# Altium PCB PCB1.PcbDoc
Units mil, origin at the board's own origin, x right, y up, seen from the top; angles counter-clockwise.
Board outline 1692.91 x 1692.91 mil, 2 copper layers (Top Layer, Bottom Layer); 22 components, 14 nets, 60 pads, 13 vias.
Unrouted connection lines stored in the file: 4.
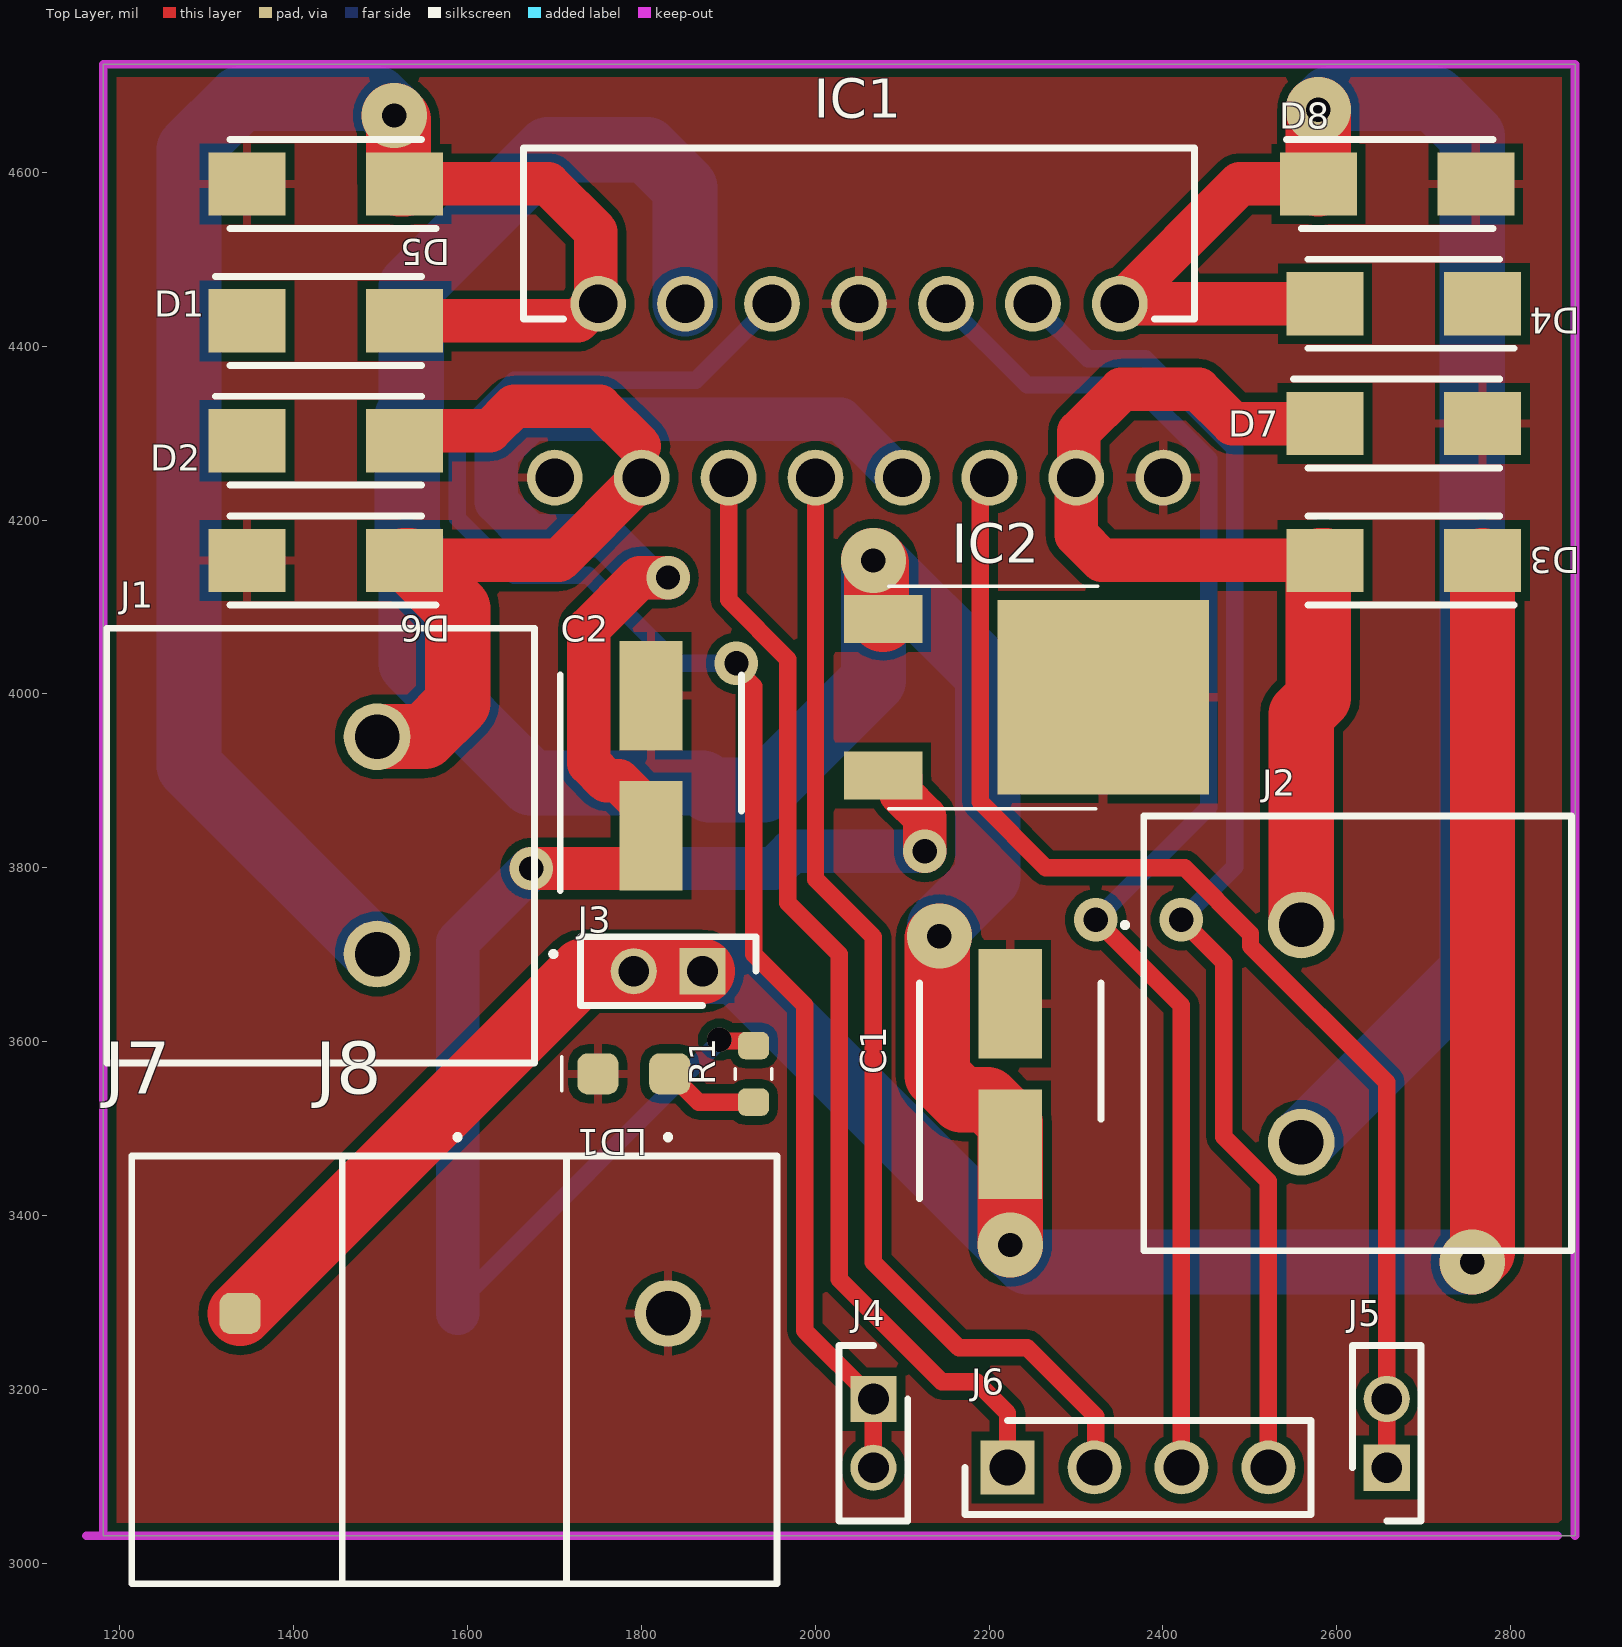
[diagram p0: Top Layer view]
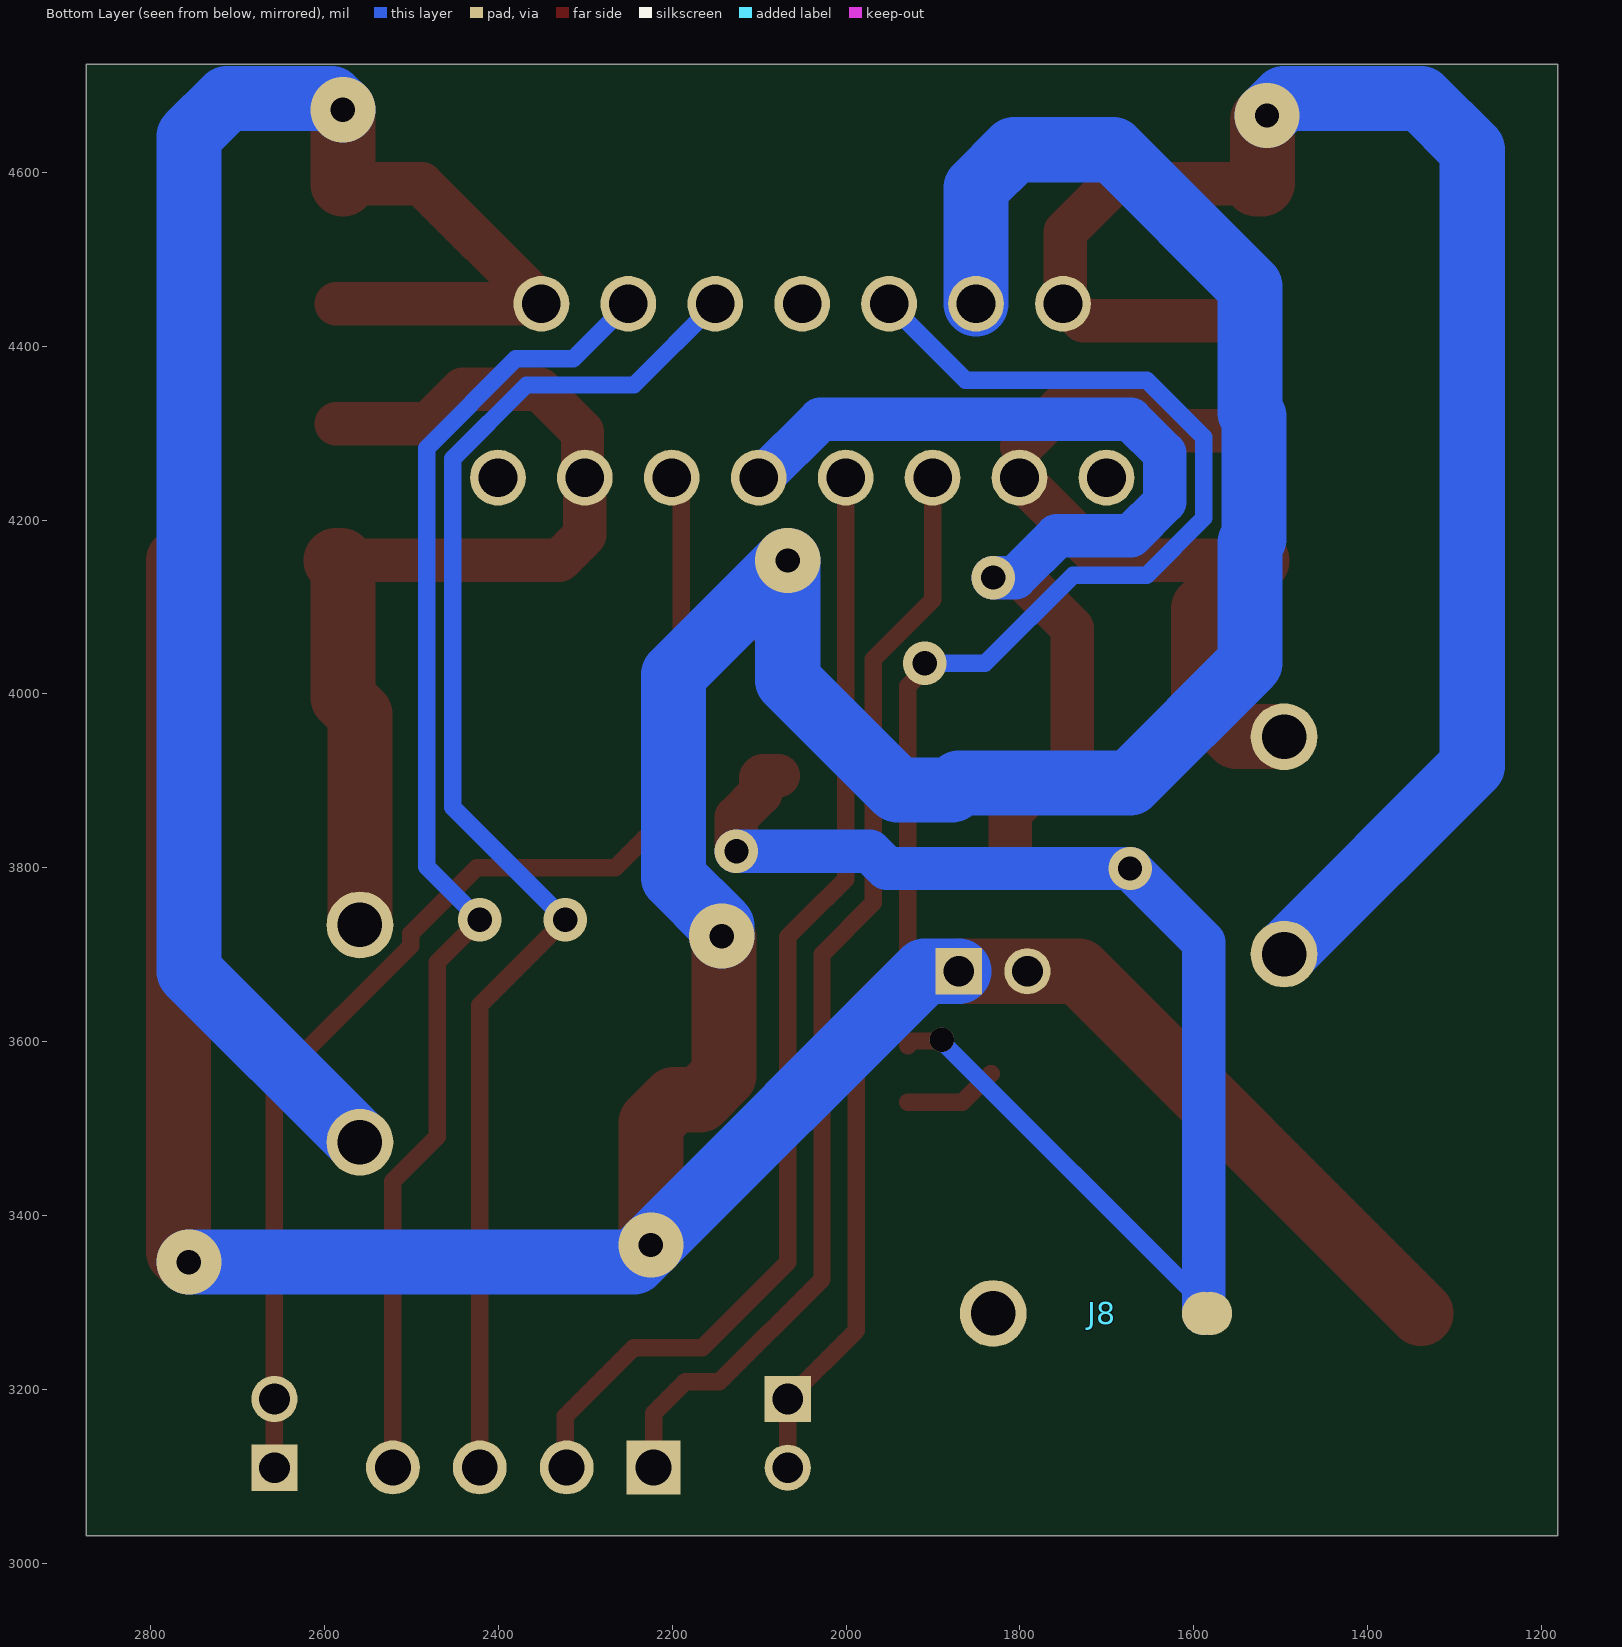
[diagram p1: Bottom Layer view, seen from below]
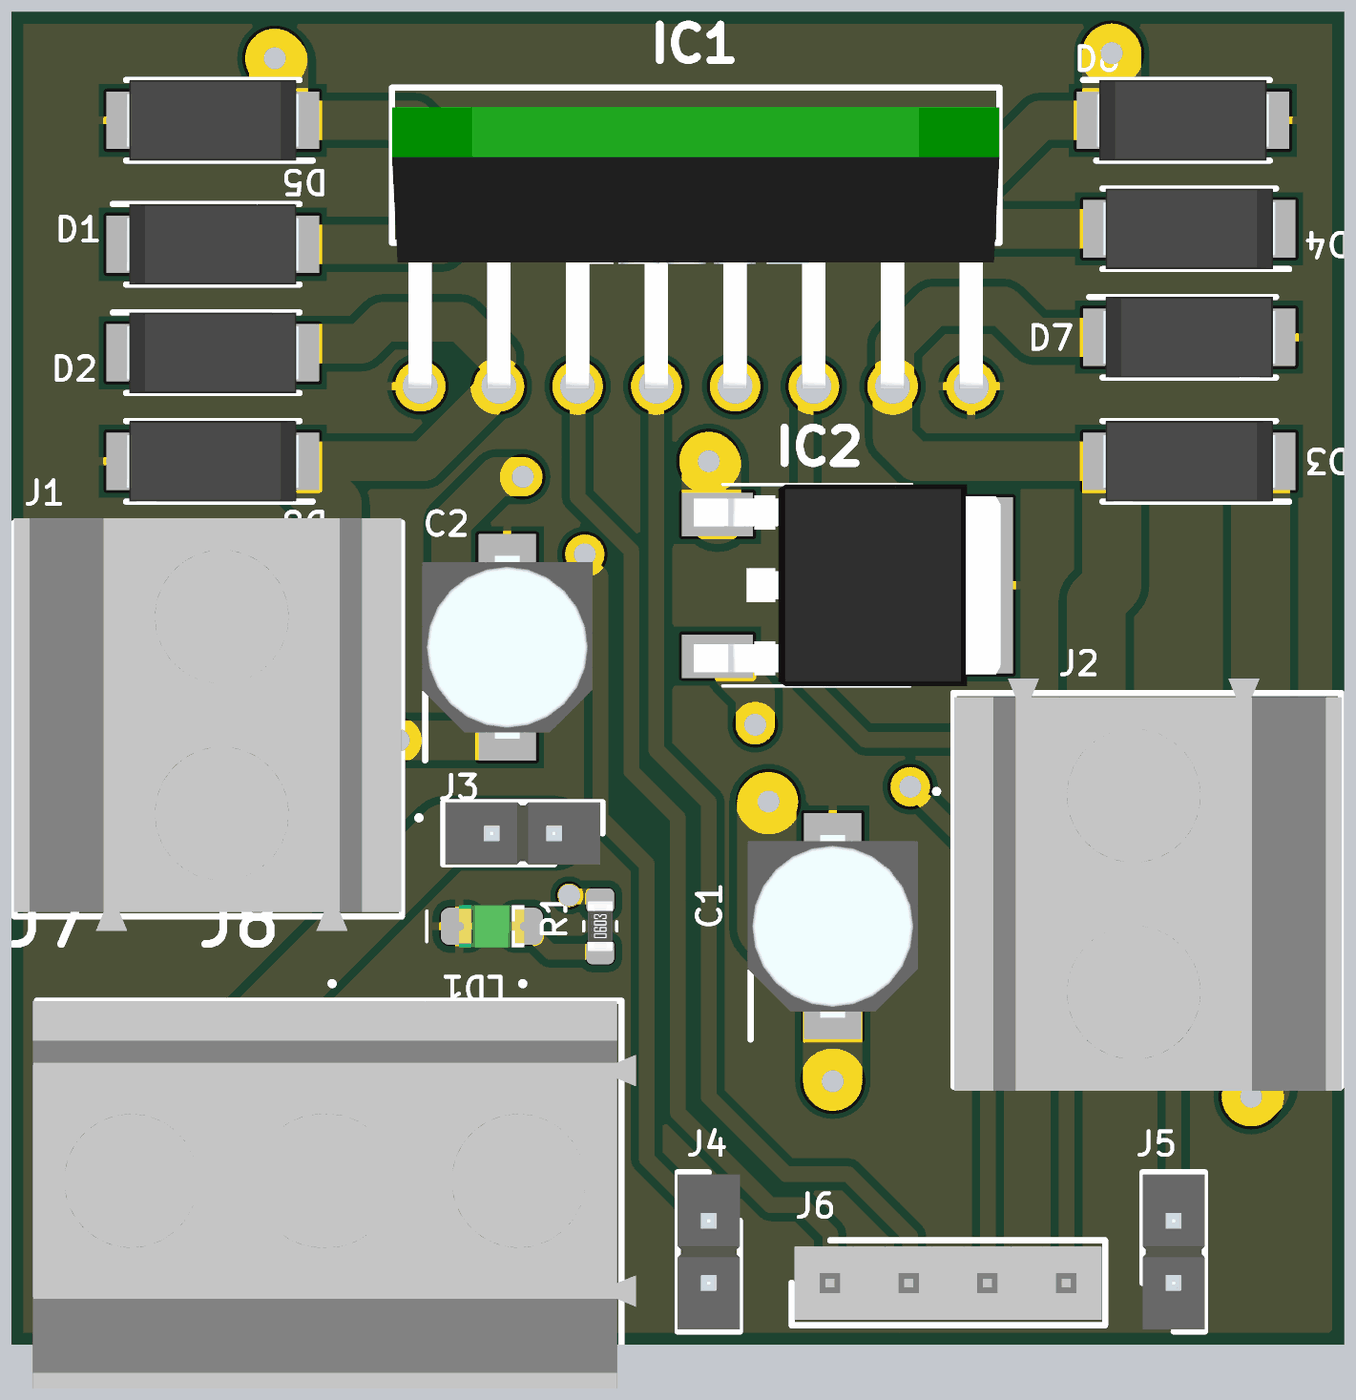
[diagram p2: 3D render of the assembled board from above, using the file's embedded part models]

## Layer stack, top to bottom
Top Solder: solder mask 0.4, Solder Resist, Dk 3.5
Top Layer: signal copper 1.4
Dielectric 1: dielectric 12.6, FR-4, Dk 4.8
Bottom Layer: signal copper 1.4
Bottom Solder: solder mask 0.4, Solder Resist, Dk 3.5

## Board outline
1181.1,3031.5 2874.02,3031.5 2874.02,4724.41 1181.1,4724.41

## Design rules (kind name [scope] priority, off if disabled: settings)
Clearance [All] p1: gap=10 ignorepadtopadclearanceinfootprint=FALSE except(0: Arc-Hole Track-Hole SMDPad-Hole THPad-Hole Via-Hole Fill-Hole Poly-Hole Region-Hole Text-Hole)
PolygonConnect [All] p1: connectstyle=Relief reliefconductorwidth=10 reliefentries=4 polygonreliefangle="90 Angle" airgapwidth=10
RoutingVias [All] p1: holewidth=28 width=75 viastyle="Through Hole" minholewidth=28 minwidth=20 maxholewidth=28 maxwidth=100
SolderMaskExpansion [All] p1: expansion=4 istentingtop=FALSE
Width [All] p1: maxlimit=100 minlimit=10 preferedwidth=20
30 further rules are at their usual default settings.

## Components (designator, comment, footprint, x,y, rotation, side; value= is the part's Value field where it differs from the comment)
C1 "220uF/35V" CAPAE530X550N 2224.41,3562.99 r90 top
C2 "220uF/35V" CAPAE530X550N 1811.02,3917.32 r90 top
D1 "M7" DIOM5626X245N 1437.01,4429.13 r0 top
D2 "M7" DIOM5626X245N 1437.01,4291.34 r0 top
D3 "M7" DIOM5626X245N 2677.17,4153.54 r180 top
D4 "M7" DIOM5626X245N 2677.17,4448.82 r180 top
D5 "M7" DIOM5626X245N 1437.01,4586.61 r180 top
D6 "M7" DIOM5626X245N 1437.01,4153.54 r180 top
D7 "M7" DIOM5626X245N 2677.17,4311.02 r0 top
D8 "M7" DIOM5626X245N 2669.29,4586.61 r0 top
IC1 "L298N" MULTIWATT15V_1 2050.39,4448.82 r0 top
IC2 "TS78M05CP" TS78M05CP 2204.72,3996.06 r270 top
J1 "klemens1" 0393800102#1 1496.06,3700.79 r90 top
J2 "klemens2" 0393800102#1 2559.06,3734.25 r270 top
J3 "header2" HDRV2W51P0X201_1X2_500X201X556P 1870.35,3681.1 r180 top
J4 "header1" HDRV2W51P0X201_1X2_500X201X556P 2066.93,3188.98 r270 top
J5 "header2" HDRV2W51P0X201_1X2_500X201X556P 2657.48,3109.96 r90 top
J6 "male header" HDRV4W87P0X254_1X4_991X236X1155P 2221.26,3110.24 r0 top
J7 "klemens1" 0393800102#2 1588.58,3287.4 r180 top
J8 "klemens1" 0393800102#3 1830.71,3287.4 r180 top
LD1 "LTST-C170KGKT" LITEON_0805-GREEN 1791.34,3562.99 r180 top
R1 "0603SAJ0102T5E" ROYALOHM_RES_0603 1929.13,3562.99 r90 top

## Footprints (in the part's own frame and the unit in brackets; to place one, negate y for a bottom-side part, rotate by r counter-clockwise, add the part's x,y. Pads: shape width x height; smd on the part's side, far side on the other; paste and mask are expansions set on the pad)
0393800102#1 [mm]
  round 1.95 hole 1.3: 1(0,0) 2(6.35,0)
  silkscreen extent -3.18,-5.2 9.52,7.9, body extent -3.65,-4.58 9.66,7.92, height 21.49
0393800102#2 [mm]
  round 1.27 smd far side: 1(0,0)
  rrect50% 1.2x1.2 smd mask+0.04: 2(6.35,0)
  silkscreen extent -3.18,-5.2 9.52,7.9, body extent -3.65,-4.58 9.66,7.92, height 21.49
0393800102#3 [mm]
  round 1.95 hole 1.3: 1(0,0)
  round 1.27 smd far side: 2(6.35,0)
  silkscreen extent -3.18,-5.2 9.52,7.9, body extent -3.65,-4.58 9.66,7.92, height 21.49
CAPAE530X550N [mm]
  rect 3.2x1.85 smd: 1(-2.05,0) 2(2.05,0)
  silkscreen extent -3.65,-2.65 2.65,2.65, body extent -2.95,-2.75 2.95,2.75, height 5.5
DIOM5626X245N [mm]
  rect 2.25x1.85 smd: 1(-2.3,0) 2(2.3,0)
  silkscreen extent -3.22,-1.3 2.8,1.3, body extent -2.8,-1.3 2.8,1.3, height 2.45
HDRV2W51P0X201_1X2_500X201X556P [mm]
  rect 1.35x1.35 hole 0.9: 1(0,0)
  round 1.35 hole 0.9: 2(2.007,0)
  silkscreen extent -1.56,-1 3.57,1, body extent -1.5,-1 3.51,1, height 5.56
HDRV4W87P0X254_1X4_991X236X1155P [mm]
  rect 1.575x1.575 hole 1.05: 1(0,0)
  round 1.575 hole 1.05: 2(2.54,0) 3(5.08,0) 4(7.62,0)
  silkscreen extent -1.24,-1.37 8.86,1.37, body extent -1.15,-1.19 8.75,1.17, height 10.66
LITEON_0805-GREEN [mm]
  rrect50% 1.2x1.2 smd mask+0.04: 1(-1.05,0) 2(1.05,0)
  silkscreen extent 2.1,-0.5 2.1,0.5, body extent -1.05,-0.68 1.05,0.68, height 1.1
MULTIWATT15V_1 [mm]
  round 1.63 hole 1.13: 1(-8.89,-5.08) 2(-7.62,0) 3(-6.35,-5.08) 4(-5.08,0) 5(-3.81,-5.08) 6(-2.54,0) 7(-1.27,-5.08) 8(0,0) 9(1.27,-5.08) 10(2.54,0) 11(3.81,-5.08) 12(5.08,0) 13(6.35,-5.08) 14(7.62,0) 15(8.89,-5.08)
  silkscreen extent -9.8,-0.45 9.8,4.55, body extent -9.8,-5.17 9.8,3.92, height 21.75
ROYALOHM_RES_0603 [mm]
  rrect50% 0.8x0.9 smd paste+0 mask+0.04: 1(-0.825,0) 2(0.825,0)
  silkscreen extent -0.15,-0.53 0.15,0.53, body extent -0.8,-0.4 0.8,0.4, height 0.45
TS78M05CP [mm]
  rect 1.4x2.29 smd: 1(-2.285,-3.217) 3(2.285,-3.217)
  rect 5.69x6.18 smd: 2(0,3.217)
  silkscreen extent -3.25,-3.05 3.25,3.05, body extent -3.25,-3.98 3.25,5.92, height 2.38

## Part data
C1 C2: library part UWX0J470MCL1GB, "Capacitor Polarised", Manufacturer_Name=Nichicon, Mouser Part Number=647-UWX0J470MCL1, Arrow Part Number=UWX0J470MCL1GB, Arrow Price/Stock=https://www.arrow.com/en/products/uwx0j470mcl1gb/nichicon?region=nac, Datasheet Link=https://componentsearchengine.com/Datasheets/2/UWX0J470MCL1GB.pdf, Height=5.5mm, Manufacturer_Part_Number=UWX0J470MCL1GB, Mouser Price/Stock=https://www.mouser.co.uk/ProductDetail/Nichicon/UWX0J470MCL1GB?qs=e8oIoAS2J1Ro712%252BE6r%252Bfg%3D%3D
D1 D2 D3 D4 D5 D6 D7 D8: "Diode", Manufacturer_Name=LGE, Datasheet Link=https://datasheet.lcsc.com/szlcsc/LGE-M7-SMAJ_C330214.pdf, Height=2.45mm, Manufacturer_Part_Number=M7
IC1: "Integrated Circuit", Manufacturer_Name=Magnatec, Manufacturer_Part_Number=L298N
IC2: "Integrated Circuit", Manufacturer_Name="Taiwan Semiconductor", Mouser Part Number=821-TS78M05CP, Datasheet Link=https://componentsearchengine.com/Datasheets/1/TS78M05CP.pdf, Height=2.38mm, Manufacturer_Part_Number=TS78M05CP, Mouser Price/Stock=https://www.mouser.co.uk/ProductDetail/Taiwan-Semiconductor/TS78M05CP?qs=F0bBuU9YDEzJZsmmDzcbEA%3D%3D
J1 J2 J7 J8: library part 0393800102, "Connector", Manufacturer_Name=Molex, Mouser Part Number=N/A, Arrow Part Number=0393800102, Arrow Price/Stock=https://www.arrow.com/en/products/0393800102/molex, Datasheet Link=https://www.molex.com/pdm_docs/sd/393800102_sd.pdf, Height=21.63mm, Manufacturer_Part_Number=0393800102, Mouser Price/Stock=https://www.mouser.co.uk/ProductDetail/Molex/0393800102?qs=PBcRNPEHKspywEvg9%2FvnAw%3D%3D
J3 J4 J5: library part 26630201RP2, "Connector", Manufacturer_Name=NorComp, Mouser Part Number=636-26630201RP2, Datasheet Link=https://datasheet.datasheetarchive.com/originals/dk/DKDS-31/606291.pdf, Height=5.563mm, Manufacturer_Part_Number=26630201RP2, Mouser Price/Stock=https://www.mouser.co.uk/ProductDetail/NorComp/26630201RP2?qs=TaIhzdgpGpXrxdLS9EY2Xg%3D%3D
J6: library part 0022032041, "Connector", Manufacturer_Name=Molex, Mouser Part Number=N/A, Arrow Part Number=0022032041, Arrow Price/Stock=https://www.arrow.com/en/products/0022032041/molex?region=europe, Datasheet Link=http://www.molex.com/pdm_docs/sd/022032041_sd.pdf, Height=11.55mm, Manufacturer_Part_Number=0022032041, Mouser Price/Stock=https://www.mouser.co.uk/ProductDetail/Molex/0022032041?qs=PBcRNPEHKsrt5pJfEqGMHQ%3D%3D
LD1: "LED GREEN CLEAR SMD", Supplier Part Number 1=160-1414-1-ND, Supplier 1=Digi-Key, Supplier 2=Mouser, Supplier Part Number 2=859-LTST-C170KGKT
R1: "RES SMD 1K OHM 5% 1/10W 0603", Resistance="1 k"

## Via types
v1: diameter 75, hole 28, Top Layer to Bottom Layer, 6 vias
v2: diameter 50, hole 28, Top Layer to Bottom Layer, 6 vias
v3: diameter 28, hole 28, Top Layer to Bottom Layer, 1 vias

## Nets (pads, with @x,y where several pads share a name; then routed paths per layer and width w, separated by ;. In a path a pad name is that pad's centre, name@x,y a point inside that pad or via, vN(x,y) a via of type N, cw(c..) or ccw(c..) an arc to the next point about the centre after c; other vN are vias at no path point)
+5V: C2.1 IC1.9 IC2.3 J7.1 J8.2 R1.2 | length 2956.2
  Top Layer w20: v3(1889.76,3602.36) 1891.29,3600.83 1923.77,3600.83 R1.2
  Top Layer w50: v2(1673.23,3799.21) 1799.61,3799.21 1811.02,3810.63 C2.1 1811.02,3863.19 1774.17,3900.04 1760.11,3900.04 1739.61,3920.54 1739.61,4075.52 1797.94,4133.86 v2(1830.71,4133.86) ; IC2.3 2095.59,3906.1 2098.15,3903.54 2098.15,3886.02 2125.98,3858.19 v2(2125.98,3818.9)
  Bottom Layer w20: J7.1@1588.58,3299.02 1889.76,3600.2 v3(1889.76,3602.36)
  Bottom Layer w50: J7.1 1588.58,3299.02 1588.58,3714.57 v2(1673.23,3799.21) 1952.92,3799.21 1972.61,3818.9 v2(2125.98,3818.9) ; v2(1830.71,4133.86) 1805.33,4133.86 1757.46,4181.73 1672.61,4181.73 1633.31,4221.03 1633.31,4276.61 1672.61,4315.91 2029.47,4315.91 2096.56,4248.82 IC1.9
ENA: IC1.6 J4.1 J4.2 | length 1899.6
  Top Layer w20: v2(1909.45,4035.43) 1909.45,4028.4 1929.13,4008.72 1929.13,3700.79 1988.19,3641.73 1988.19,3267.72 J4.1 J4.2
  Bottom Layer w20: v2(1909.45,4035.43) 1840.12,4035.43 1738.82,4136.73 1653.97,4136.73 1588.31,4202.39 1588.31,4295.25 1653.97,4360.91 1862.48,4360.91 IC1.6
ENB: IC1.11 J5.1 J5.2 | length 1430.5
  Top Layer w20: IC1.11 2200.39,4236.87 2189.72,4226.2 2189.72,3875.77 2265.42,3800.08 2424.98,3800.08 2500.67,3724.39 2500.67,3710.07 2657.48,3553.26 J5.2 J5.1
GND: C1.2 C2.2 D5.2 D6.2 D7.2 D8.2 IC1.1 IC1.8 IC1.15 IC2.2 J8.1 LD1.2
IN1: IC1.5 J6.1 | length 1294.6
  Top Layer w20: IC1.5 1900.39,4108.13 1968.5,4040.02 1968.5,3759.84 2027.56,3700.79 2027.56,3326.77 2145.67,3208.66 2185.04,3208.66 2221.26,3172.44 J6.1
IN2: IC1.7 J6.2 | length 1318.9
  Top Layer w20: IC1.7 2000.39,3787.01 2047.24,3740.16 2066.93,3720.47 2066.93,3346.46 2165.35,3248.03 2244.09,3248.03 2322.83,3169.29 2322.83,3111.81 J6.2
IN3: IC1.10 J6.3 | length 1630.6
  Top Layer w20: v2(2322.83,3740.16) 2421.26,3641.73 J6.3
  Bottom Layer w20: IC1.10 2243.83,4355.38 2367.49,4355.38 2452.48,4270.39 2452.48,3869.8 v2(2322.83,3740.16)
IN4: IC1.12 J6.4 | length 1540.2
  Top Layer w20: v2(2421.26,3740.16) 2470.11,3691.31 2470.11,3490.63 2521.26,3439.48 J6.4
  Bottom Layer w20: IC1.12 2313.83,4385.38 2379.92,4385.38 2482.48,4282.82 2482.48,3801.38 v2(2421.26,3740.16)
NetLD1_1: LD1.1 R1.1 | length 109.9
  Top Layer w20: LD1.1 1833.66,3562.99 1866.14,3530.51 R1.1
OUT1: D1.2 D5.1 IC1.2 J1.1 | length 1924.8
  Top Layer w50: D1.2 1726.87,4429.13 1746.56,4448.82 IC1.2 ; D5.1 1692.91,4586.61 1747.68,4531.85 IC1.2@1747.68,4451.53
  Top Layer w75: v1(1515.75,4665.35) 1520.77,4660.33 1520.77,4587.7 1521.85,4586.61 D5.1
  Bottom Layer w75: J1.1 1279.53,3917.32 1279.53,4625.98 1338.58,4685.04 1496.06,4685.04 v1(1515.75,4665.35)
OUT2: D2.2 D6.1 IC1.3 J1.2 | length 913.6
  Top Layer w50: D2.2 1538.98,4302.76 1625.59,4302.76 1653.54,4330.71 1751.97,4330.71 1797.68,4285 ; D6.1@1533.27,4153.54 1705.12,4153.54 IC1.3
  Top Layer w75: J1.2 1496.4,3951.13 1550.55,3951.13 1588.85,3989.42 1588.85,4097.97 1533.27,4153.54 D6.1
OUT3: D3.2 D7.1 IC1.13 J2.1 | length 1166.5
  Top Layer w50: D3.2@2580.91,4153.54 2329.68,4153.54 2300.39,4182.83 IC1.13 2303.11,4251.53 2303.11,4301.38 2352.12,4350.39 2440.94,4350.39 2480.32,4311.02 D7.1
  Top Layer w75: J2.1 2559.06,3976.38 2578.74,3996.06 2578.74,4145.67 2579.82,4146.75 2579.82,4152.46 2580.91,4153.54 D3.2
OUT4: D4.2 D8.1 IC1.14 J2.2 | length 2046.1
  Top Layer w50: D8.1 2488.19,4586.61 IC1.14 D4.2
  Top Layer w75: D8.1 v1(2578.74,4671.91)
  Bottom Layer w75: J2.2 2755.91,3681.1 2755.91,4641.11 2711.97,4685.04 2591.87,4685.04 v1(2578.74,4671.91)
VCC: C1.1 D1.1 D2.1 D3.1 D4.1 IC1.4 IC2.1 J3.1 J3.2 J7.2 | length 5271.8
  Top Layer w75: J7.2 1732.28,3681.1 J3.2 J3.1 ; v1(2066.93,4153.54) 2070.49,4149.98 2070.49,4093.6 IC2.1 ; v1(2142.83,3721.4) 2140.49,3719.06 2140.49,3561.03 2168.32,3533.21 2197.89,3533.21 2224.41,3506.69 C1.1 v1(2224.41,3366.14) ; v1(2755.91,3346.46) 2767.72,3358.27 D3.1
  Bottom Layer w75: IC1.4 1850.39,4582.05 1806.46,4625.98 1692.91,4625.98 1535.43,4468.5 1535.43,4323.69 1530.81,4319.06 1530.81,4178.57 1535.43,4173.95 1535.43,4035.43 1673.23,3897.64 1870.08,3897.64 1878.38,3889.33 1940.51,3889.33 2066.93,4015.75 v1(2066.93,4153.54) 2198.48,4021.99 2198.48,3788.87 2142.83,3733.21 v1(2142.83,3721.4) ; J3.1 1909.45,3681.1 v1(2224.41,3366.14) 2244.09,3346.46 v1(2755.91,3346.46)

## Polygon pours and split planes (outlines as drawn)
GND on Top Layer "GND_L01_P000" (solid, pour order 0): 1181.1,4724.41 2874.02,4724.41 2874.02,3031.5 1181.1,3031.5

## Keep-outs
Top Layer:
  lines w10: 1161.42,3031.5 2854.33,3031.5 ; 1181.1,3031.5 1181.1,4724.41 2874.02,4724.41 2874.02,3031.5